# EAGLE board isp_hvp_shield (EAGLE 7.7.0)
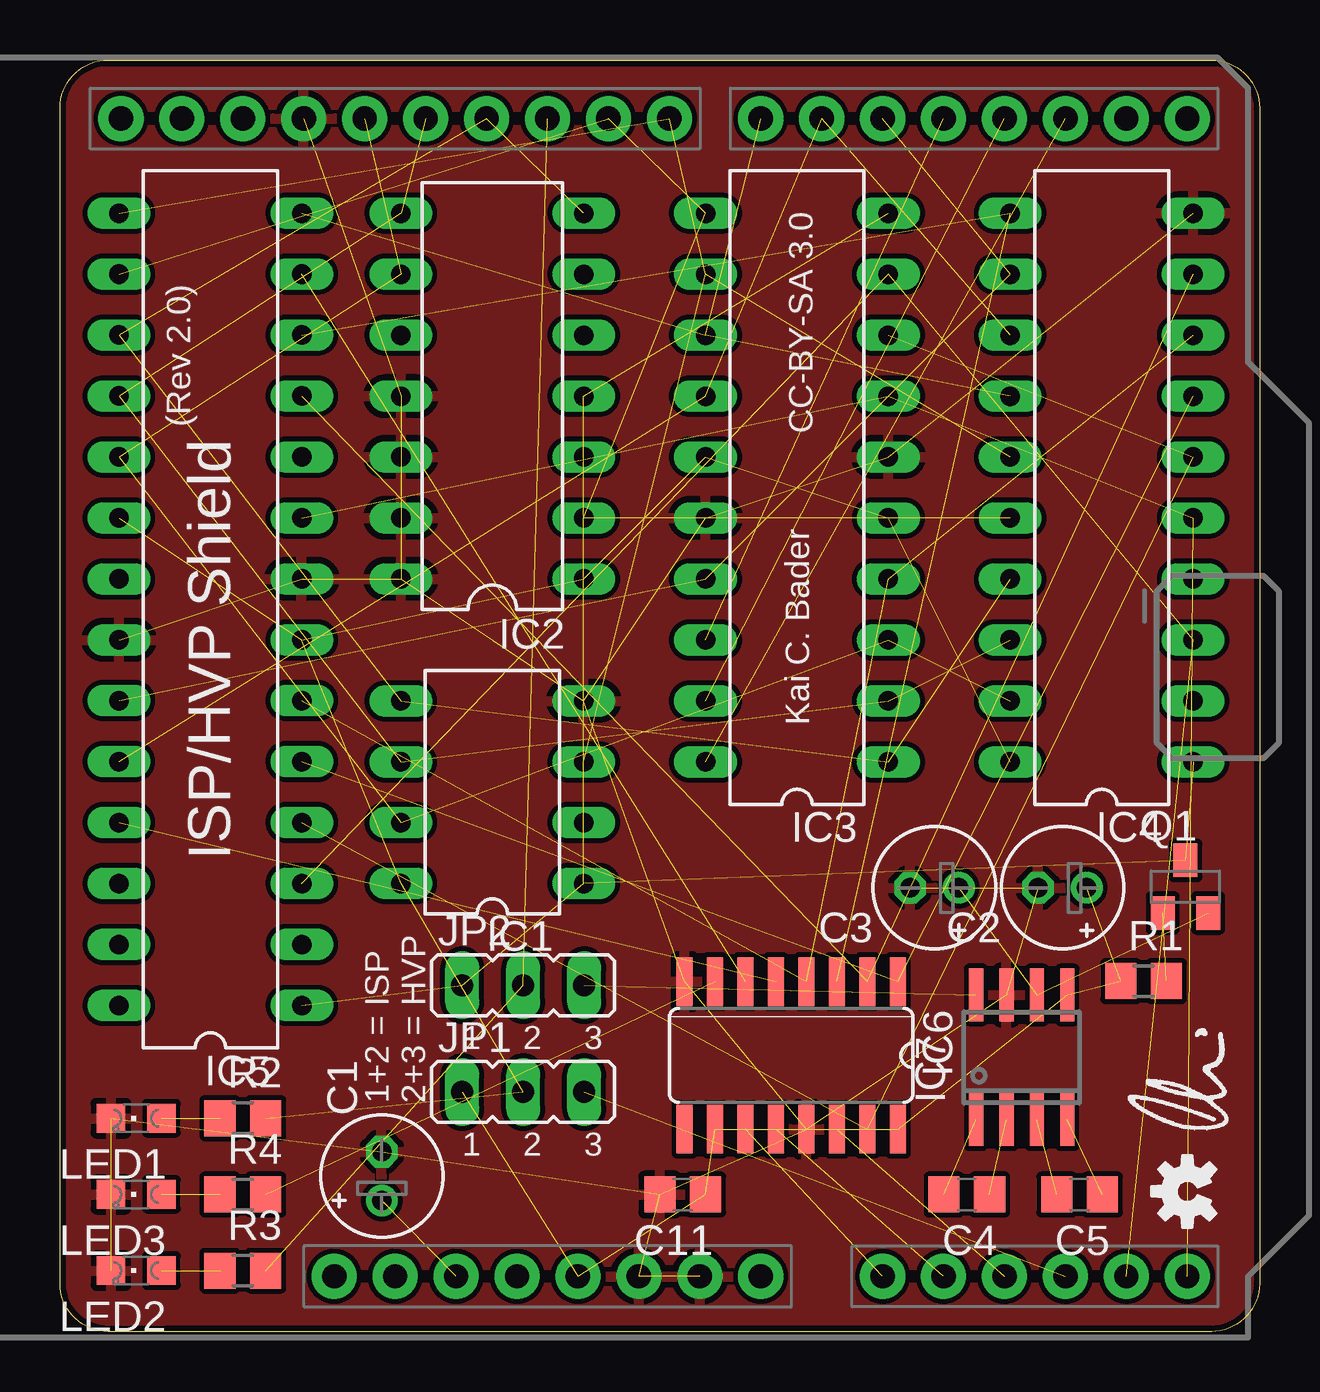
[diagram p0: board, top side]
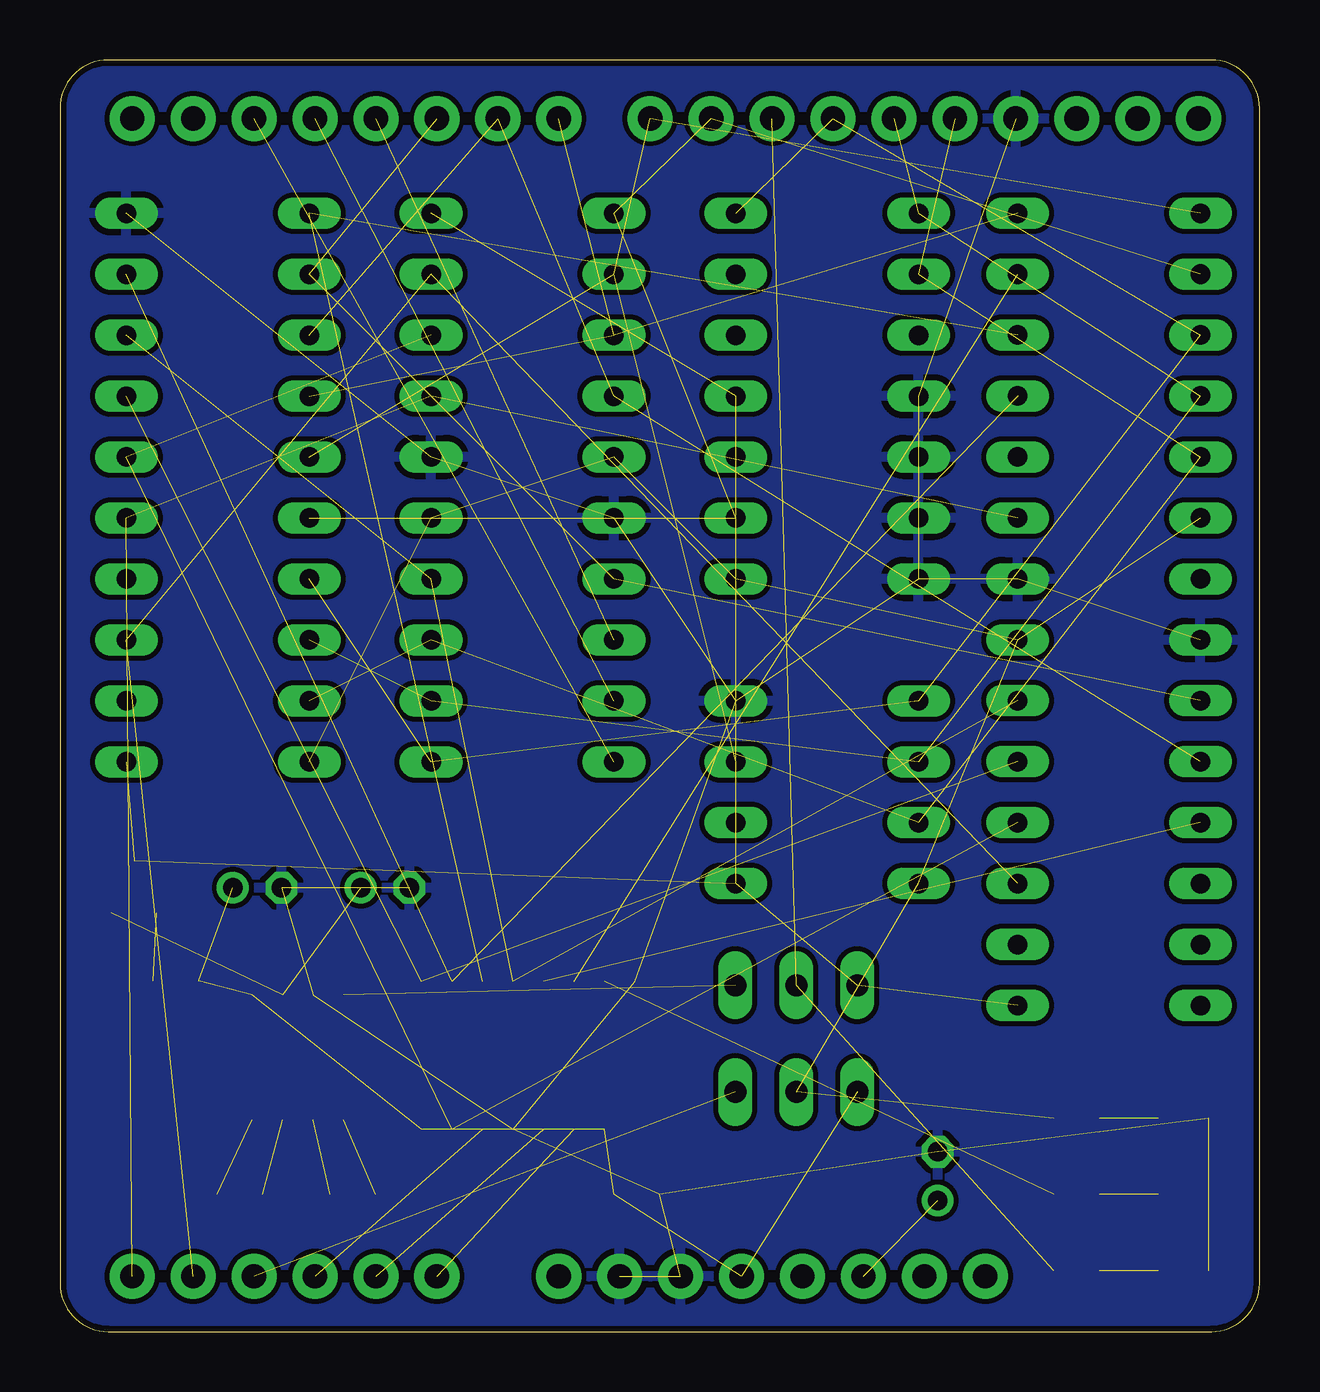
[diagram p1: board, bottom side, seen from below]

Size 50 x 53 mm. Coordinates in mm from the lower left corner, seen from the top.
Outline: 0,2 0,51 arc-90 2,53 48,53 arc-90 50,51 50,2 arc-90 48,0 2,0 arc-90 0,2
Copper layers (1*16): Top 0.035mm / dielectric 1.5mm / Bottom 0.035mm
Design rules "ITEADstudio_DRC *": minimum track width 8mil, minimum drill 12mil, track to track 8mil, track to pad 8mil, pad to pad 8mil, via to via 8mil, smd to smd 0mil, copper to edge 10mil, drill to drill 10mil, minimum pad ring 10mil, minimum via ring 8mil, stop-mask expansion 2mil, vias tented up to drill 100mil, thermal gap 10mil

## Footprints (pad centres in the part's own frame; a part is rotated, then mirrored left to right if it is on the bottom)
E2-5 = drill 0.813 pad 1.27: + -1.016,0 | drill 0.813 pad 1.27 octagon: - 1.016,0
C0805 = smd 1.3 x 1.5: 1 -0.95,0; 2 0.95,0
DIL08 = drill 0.813 long: 1 -3.81,-3.81; 2 -1.27,-3.81; 3 1.27,-3.81; 4 3.81,-3.81; 5 3.81,3.81; 6 1.27,3.81; 7 -1.27,3.81; 8 -3.81,3.81
DIL14 = drill 0.813 long: 1 -7.62,-3.81; 2 -5.08,-3.81; 3 -2.54,-3.81; 4 0,-3.81; 5 2.54,-3.81; 6 5.08,-3.81; 7 7.62,-3.81; 8 7.62,3.81; 9 5.08,3.81; 10 2.54,3.81; 11 0,3.81; 12 -2.54,3.81; 13 -5.08,3.81; 14 -7.62,3.81
DIL20 = drill 0.813 long: 1 -11.43,-3.81; 2 -8.89,-3.81; 3 -6.35,-3.81; 4 -3.81,-3.81; 5 -1.27,-3.81; 6 1.27,-3.81; 7 3.81,-3.81; 8 6.35,-3.81; 9 8.89,-3.81; 10 11.43,-3.81; 11 11.43,3.81; 12 8.89,3.81; 13 6.35,3.81; 14 3.81,3.81; 15 1.27,3.81; 16 -1.27,3.81; 17 -3.81,3.81; 18 -6.35,3.81; 19 -8.89,3.81; 20 -11.43,3.81
DIL28 = drill 0.813 long: 1 -11.43,-3.81; 2 -8.89,-3.81; 3 -6.35,-3.81; 4 -3.81,-3.81; 5 -1.27,-3.81; 6 1.27,-3.81; 7 3.81,-3.81; 8 6.35,-3.81; 9 8.89,-3.81; 10 11.43,-3.81; 11 13.97,-3.81; 12 16.51,-3.81; 13 19.05,-3.81; 14 21.59,-3.81; 15 21.59,3.81; 16 19.05,3.81; 17 16.51,3.81; 18 13.97,3.81; 19 11.43,3.81; 20 8.89,3.81; 21 6.35,3.81; 22 3.81,3.81; 23 1.27,3.81; 24 -1.27,3.81; 25 -3.81,3.81; 26 -6.35,3.81; 27 -8.89,3.81; 28 -11.43,3.81
SO16 = smd 0.66 x 2.032: 1 -4.445,-3.073; 2 -3.175,-3.073; 3 -1.905,-3.073; 4 -0.635,-3.073; 5 0.635,-3.073; 6 1.905,-3.073; 7 3.175,-3.073; 8 4.445,-3.073; 9 4.445,3.073; 10 3.175,3.073; 11 1.905,3.073; 12 0.635,3.073; 13 -0.635,3.073; 14 -1.905,3.073; 15 -3.175,3.073; 16 -4.445,3.073
SO08 = smd 0.6 x 2.2: 1 -1.905,-2.6; 2 -0.635,-2.6; 3 0.635,-2.6; 4 1.905,-2.6; 5 1.905,2.6; 6 0.635,2.6; 7 -0.635,2.6; 8 -1.905,2.6
JP2 = drill 0.914 long: 1 -2.54,0; 2 0,0; 3 2.54,0
CHIPLED_0805 = smd 1.2 x 1.2: A 0,-1.05; C 0,1.05
UNO_R3_SHIELD = drill 1.016 pad 1.88: 3.3V 50.8,26.67; 5V 50.8,29.21; A0 50.8,41.91; A1 50.8,44.45; A2 50.8,46.99; A3 50.8,49.53; A4 50.8,52.07; A5 50.8,54.61; AREF 2.54,15.24; D2 2.54,49.53; D3 2.54,46.99; D4 2.54,44.45; D5 2.54,41.91; D6 2.54,39.37; D7 2.54,36.83; D8 2.54,33.02; D9 2.54,30.48; D10 2.54,27.94; D11 2.54,25.4; D12 2.54,22.86; D13 2.54,20.32; GND@0 50.8,31.75; GND@1 50.8,34.29; GND@2 2.54,17.78; IOREF 50.8,21.59; NC 50.8,19.05; RES 50.8,24.13; RX 2.54,54.61; SCL 2.54,10.16; SDA 2.54,12.7; TX 2.54,52.07; VIN 50.8,36.83
SOT23-BEC = smd 1 x 1.4: B -0.95,-1.1; C 0,1.1; E 0.95,-1.1
R0805 = smd 1.3 x 1.5: 1 -0.95,0; 2 0.95,0

## Placement (x,y rotation side)
C1  10uF  [E2-5]  13.41,6.48 90 top
C2  4.7uF  [E2-5]  41.78,18.5 180 top
C3  4.7uF  [E2-5]  36.45,18.5 180 top
C4  0.22uF  [C0805]  37.8,5.71 180 top
C5  0.22uF  [C0805]  42.5,5.71 180 top
C11  0.1uF  [C0805]  25.95,5.71 180 top
IC1  ATtiny13/15/25/45/85  [DIL08]  18.02,22.48 90 top
IC2  ATtiny24/44/84  [DIL14]  18.02,38.99 90 top
IC3  TINY26/261/461/861  [DIL20]  30.72,35.18 90 top
IC4  ATtiny2313/4313  [DIL20]  43.42,35.18 90 top
IC5  ATMEGA328  [DIL28]  6.27,25.02 90 top
IC6  74HCT595D  [SO16]  30.48,11.51 180 top
IC7  MAX662A  [SO08]  40.09,11.43 0 top
JP1  [JP2]  19.3,9.99 0 top
JP2  [JP2]  19.3,14.43 0 top
LED1  [CHIPLED_0805]  3.17,8.89 90 top
LED2  [CHIPLED_0805]  3.17,2.54 90 top
LED3  [CHIPLED_0805]  3.17,5.71 90 top
PINS  UNO_R3_SHIELDV1  [UNO_R3_SHIELD]  -7.62,53.1 270 top
Q1  BC858BSMD  [SOT23-BEC]  46.91,18.54 0 top
R1  47k  [R0805]  45.16,14.61 0 top
R2  220  [R0805]  7.62,8.89 0 top
R3  220  [R0805]  7.62,2.54 0 top
R4  220  [R0805]  7.62,5.71 0 top
U$1  [OSHW-LOGO-S]  46.99,5.84 90 top
U$3  [KAI-LOGO-M]  48.9,8.26 90 top

## Library data of the parts
C1-C5 C11 R1-R4 = rcl
IC1 = kaibader; OC_FARNELL: unknown; OC_NEWARK: unknown
IC2-IC5 IC7 PINS U$1 U$3 = kaibader
IC6 = 74xx-eu
JP1 JP2 = jumper
LED1-LED3 = led
Q1 = transistor-pnp

## Nets
220: LED2.A R3.1
+5V: IC1.8 IC2.1 IC3.5 IC3.15 IC4.20 IC5.7 IC5.20 JP1.2 R2.2
A0_SCK: IC6.11 PINS.A0
A1_RCK: IC6.12 PINS.A1
A2_SER: IC6.14 PINS.A2
A3_POWER: JP1.3 PINS.A3
A4: IC3.9 IC4.3 IC5.3 PINS.A4
A5: IC3.7 IC4.5 IC5.9 PINS.A5
AREF: IC5.21
D2: IC3.20 PINS.D2
D3: IC3.19 PINS.D3
D4: IC3.18 PINS.D4
D5: IC3.17 IC4.12 IC5.23 PINS.D5
D6: IC3.14 IC4.13 IC5.24 PINS.D6
D7: IC3.13 IC4.14 IC5.14 PINS.D7
D8: IC1.3 IC3.12 IC4.15 IC5.15 PINS.D8
D9: IC1.2 IC2.2 IC3.11 IC4.16 IC5.16 PINS.D9
D10: JP2.2 PINS.D10 R3.2
D10_RESET: IC1.1 IC2.4 IC3.10 IC4.1 IC5.1 JP2.1 Q1.C
D11_MOSI: IC1.5 IC2.7 IC3.1 IC4.17 IC5.17 PINS.D11
D12_MISO: IC1.6 IC2.8 IC3.2 IC4.18 IC5.18 PINS.D12
D13_SCK: IC1.7 IC2.9 IC3.3 IC4.19 IC5.19 PINS.D13
GND: C1.- C2.- C3.- C11.2 IC1.4 IC2.11 IC2.12 IC2.13 IC2.14 IC3.6 IC3.16 IC4.10 IC5.8 IC5.22 IC6.8 IC6.13 IC7.7 LED1.C LED2.C LED3.C PINS.GND@0 PINS.GND@1 PINS.GND@2
N$1: IC7.8 JP2.3
N$2: C1.+ PINS.RES
N$3: Q1.B R1.2
N$4: C5.1 IC7.4
N$5: C5.2 IC7.3
N$6: C4.1 IC7.2
N$7: C4.2 IC7.1
N$8: LED1.A R2.1
N$10: LED3.A R4.1
Q0: IC3.8 IC4.6 IC5.4 IC6.15
Q1: IC4.7 IC5.5 IC6.1
Q2: IC4.9 IC5.11 IC6.2
Q3: IC4.11 IC5.12 IC6.3
Q4: IC3.4 IC4.8 IC5.6 IC6.4
Q5: IC5.25 IC6.5
Q6: IC5.13 IC6.6
Q7: IC6.7 R4.2
RX: PINS.RX
TX: PINS.TX
VCC: C2.+ C11.1 IC6.10 IC6.16 IC7.5 JP1.1 PINS.5V R1.1
VOUT: C3.+ IC7.6 Q1.E

## Tracks (layer width: path | path; a pad name or v marks a point on that pad's centre or on a via)
220  (1 unrouted)
+5V  (8 unrouted)
A0_SCK  (1 unrouted)
A1_RCK  (1 unrouted)
A2_SER  (1 unrouted)
A3_POWER  (1 unrouted)
A4  (3 unrouted)
A5  (3 unrouted)
D2  (1 unrouted)
D3  (1 unrouted)
D4  (1 unrouted)
D5  (3 unrouted)
D6  (3 unrouted)
D7  (3 unrouted)
D8  (4 unrouted)
D9  (5 unrouted)
D10  (2 unrouted)
D10_RESET  (6 unrouted)
D11_MOSI  (5 unrouted)
D12_MISO  (5 unrouted)
D13_SCK  (5 unrouted)
GND  (22 unrouted)
  pour Bottom: 50,0 0,0 0,53 50,53
  pour Top: 0,53 50,53 50,0 0,0
N$1  (1 unrouted)
N$2  (1 unrouted)
N$3  (1 unrouted)
N$4  (1 unrouted)
N$5  (1 unrouted)
N$6  (1 unrouted)
N$7  (1 unrouted)
N$8  (1 unrouted)
N$10  (1 unrouted)
Q0  (3 unrouted)
Q1  (2 unrouted)
Q2  (2 unrouted)
Q3  (2 unrouted)
Q4  (3 unrouted)
Q5  (1 unrouted)
Q6  (1 unrouted)
Q7  (1 unrouted)
VCC  (7 unrouted)
VOUT  (2 unrouted)

## Text on the board
tPlace: (Rev 2.0) | CC-BY-SA 3.0 | Kai C. Bader | ISP/HVP Shield | 1+2 = ISP / 2+3 = HVP